# EAGLE board Attenuverting mixer mutes PANEL (EAGLE 7.7.0)
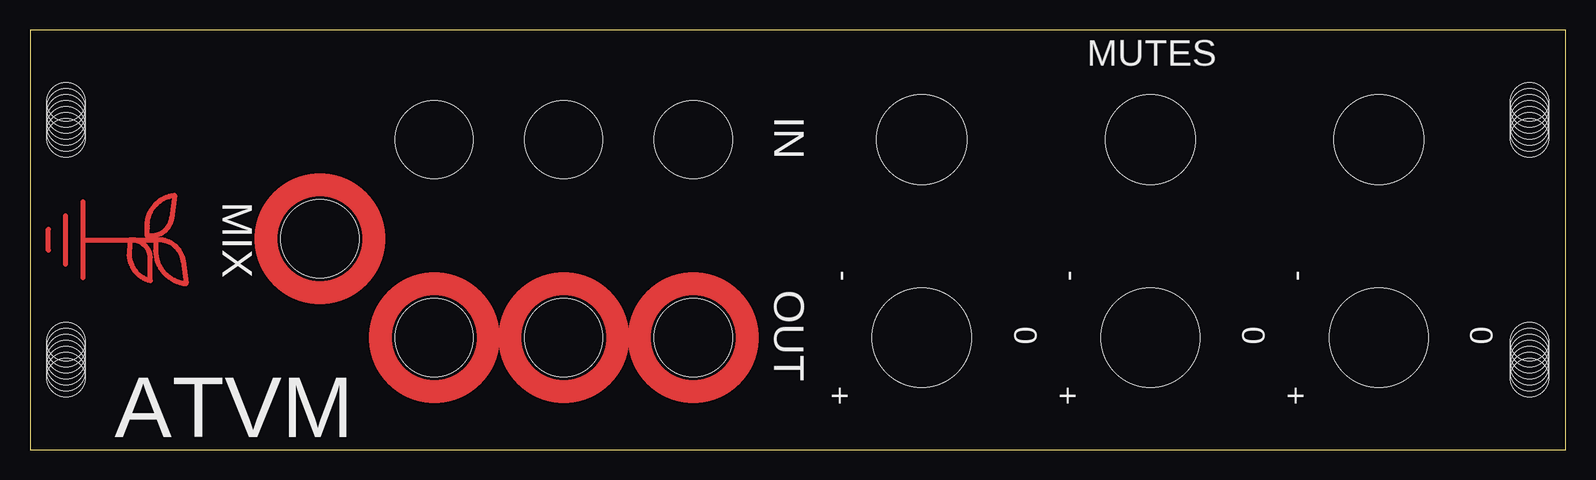
[diagram p0: board, top side]
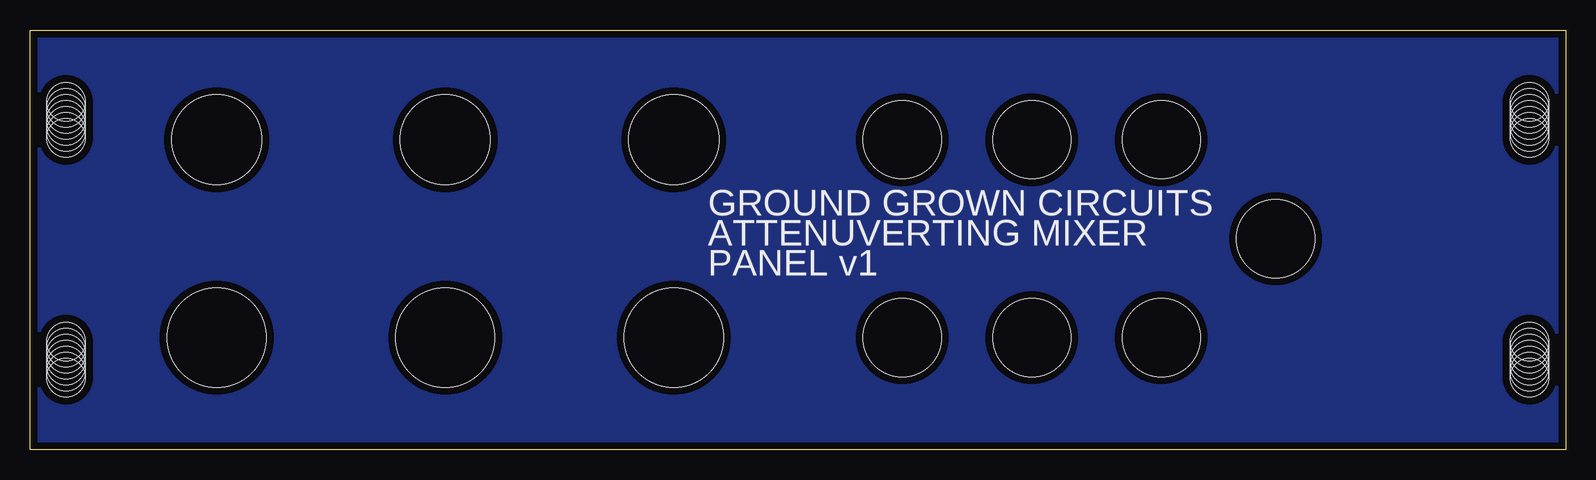
[diagram p1: board, bottom side, seen from below]

Size 128 x 35 mm. Coordinates in mm from the lower left corner, seen from the top.
Outline: 128,0 128,35 0,35 0,0 128,0
Copper layers (1*16): Top 0.035mm / dielectric 1.5mm / Bottom 0.035mm
Design rules "SparkFun": minimum track width 8mil, minimum drill 20mil, track to track 8mil, track to pad 8mil, pad to pad 8mil, via to via 8mil, smd to smd 8mil, copper to edge 8mil, drill to drill 8mil, minimum pad ring 12mil, minimum via ring 10mil, stop-mask expansion 4mil, vias tented up to drill 20mil, thermal gap 10mil

## Footprints (pad centres in the part's own frame; a part is rotated, then mirrored left to right if it is on the bottom)
JACK_DRILL = hole 6.5: 0,0
JACK_DRILL_COPPER = hole 6.5: 0,0
SWITCH_DRILL = hole 7.5: 0,0
POT_DRILL = hole 8.25: 0,0
MOUNT_DRILL = hole 3.2: 3,9; 3,8.5; 3,8; 3,7.5; 3,7; 3,6.5; 3,6

## Placement (x,y rotation side)
E$1  [JACK_DRILL]  55.28,25.84 0 bottom
E$2  [JACK_DRILL]  44.49,25.84 0 bottom
E$3  [JACK_DRILL]  33.7,25.84 0 bottom
E$4  [JACK_DRILL_COPPER]  33.7,9.34 0 top
E$5  [JACK_DRILL_COPPER]  44.49,9.34 0 top
E$6  [JACK_DRILL_COPPER]  55.28,9.34 0 top
E$7  [JACK_DRILL_COPPER]  24.17,17.59 0 top
E$8  [SWITCH_DRILL]  112.44,25.84 0 bottom
E$9  [SWITCH_DRILL]  93.39,25.84 0 bottom
E$10  [SWITCH_DRILL]  74.33,25.84 0 bottom
E$11  [POT_DRILL]  74.33,9.34 0 bottom
E$12  [POT_DRILL]  93.39,9.34 0 bottom
E$13  [POT_DRILL]  112.44,9.34 0 bottom
E$14  [MOUNT_DRILL]  128,0 0 bottom
E$15  [MOUNT_DRILL]  0,35 180 bottom
E$16  [MOUNT_DRILL]  0,0 0 top
E$17  [MOUNT_DRILL]  128,35 180 top
E$18  [LOGO_MED_COPPER]  4.5,17.5 270 top

## Library data of the parts
E$1-E$18 = GroundGrownCircuits

## Tracks (layer width: path | path; a pad name or v marks a point on that pad's centre or on a via)
S$3
  pour Bottom (isolate 0.61): 0,0 0,35 128,35 128,0

## Text on the board
tPlace: MUTES | IN | MIX | - | - | - | OUT | 0 | 0 | 0 | + | + | + | ATVM
bPlace: GROUND GROWN CIRCUITS | ATTENUVERTING MIXER | PANEL v1